# Altium PCB PendulOptic_pcb 1.PcbDoc (part 2 of 2)
Units mm, origin at the board's own origin, x right, y up, seen from the top; angles counter-clockwise.
Board outline 83.2 x 90 mm, 2 copper layers (Top Layer, Bottom Layer); 132 components, 90 nets, 419 pads, 153 vias.
Unrouted connection lines stored in the file: 4.
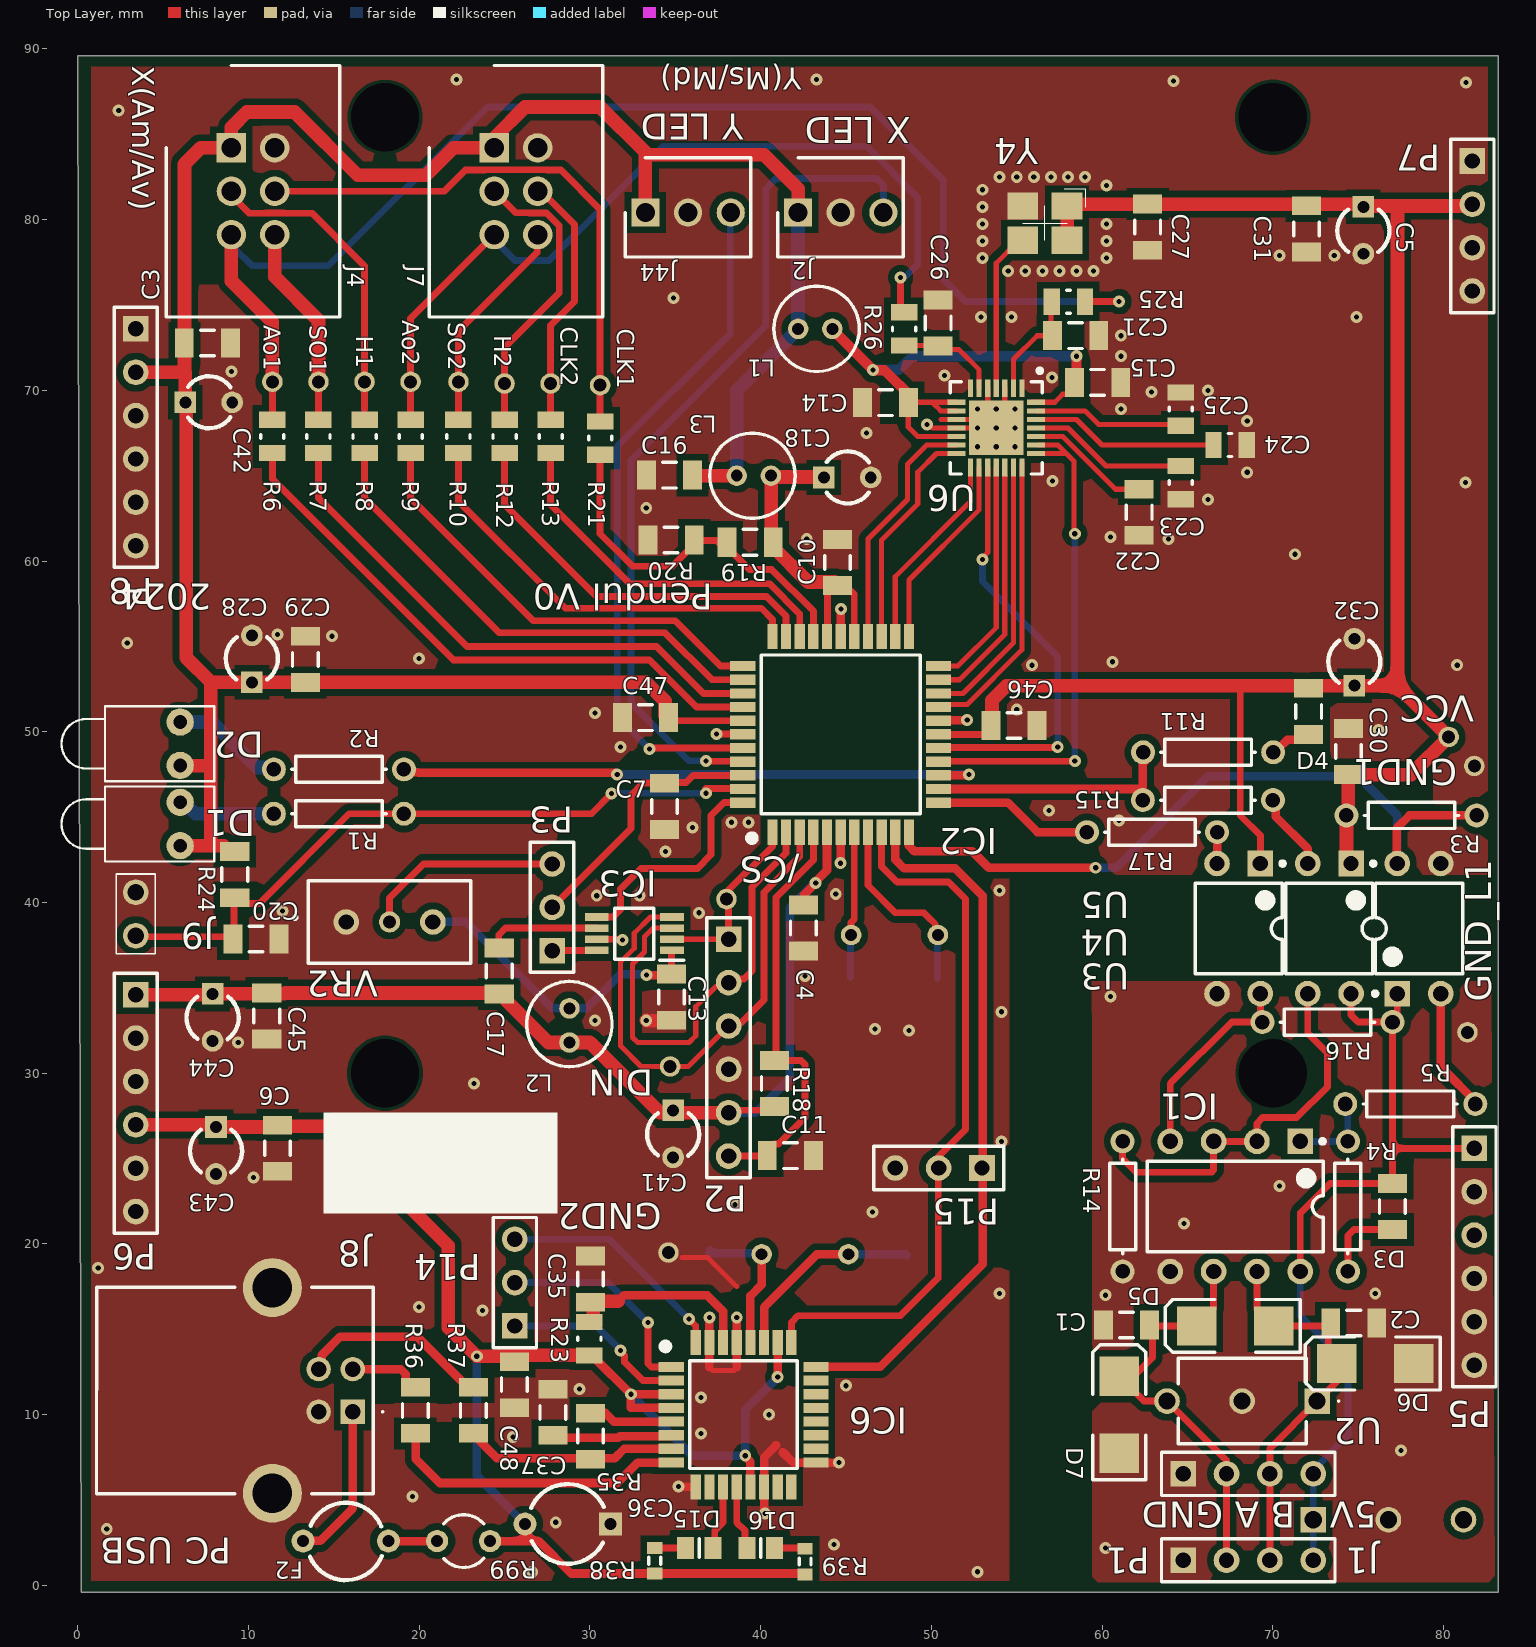
[diagram p0: Top Layer view]

## Other copper (continued)
Top Layer: (continued)
  pour cut-out: 14.508,63.869 14.677,63.7 16.392,63.7 16.392,63.531 23.815,56.108 23.315,55.608 22.769,55.608
  pour cut-out: 57.844,73.361 57.878,73.327 58.996,73.327 58.996,72.096 58.942,72.15 57.85,72.15
  pour cut-out: 57.625,76.043 58.425,76.043 58.425,74.325 58.975,74.325 58.996,74.304 58.996,73.455 57.939,73.455 57.75,73.266
  pour cut-out: 61.241,64.522 61.395,64.676 62.487,64.676 62.487,63.36 62.447,63.32 61.241,63.32
  pour cut-out: 71.513,47.8 73.813,47.8 73.813,46.8 71.513,46.8
Bottom Layer:
  pour cut-out: 81.225,27.415 81.225,26.825 81.15,26.75 82.873,26.75 82.873,27.337 82.795,27.415
  pour cut-out: 78.4,33.8 78.968,33.8 79.012,33.845 78.443,34.415 78.443,35.4
  pour cut-out: 70.092,33.848 70.264,33.676 76.143,33.676 76.143,33.957 76.015,34.085 70.275,34.085
  pour cut-out: 34.131,15.204 34.148,15.222 35.145,15.222 35.145,15.39 34.45,16.084
  pour cut-out: 33.204,14.669 33.204,14.527 32.655,13.978 30.807,15.827 30.807,15.938 30.634,15.765
  pour cut-out: 24.404,85.988 24.493,85.9 25.8,85.9 25.8,85.6 25.662,85.462 24.654,85.462
  pour cut-out: 40,83.6 40,82.9 40.2,82.7 40.512,83.012 45.606,83.012 45.606,83.262 45.855,83.512
  pour cut-out: 33.9,85.9 33.867,85.867 33.867,84.733 46.301,84.733 46.434,84.865 46.147,85.153 46.147,85.988

## Silkscreen, mask and mechanical layers (free items; w line width, h text height)
Top Overlay:
  rectangle: 14.4,21.8 28.1,27.7
  text "X(Am/Av)" at 3.2,89 h1.3 r270
  text "Y(Ms/Md)" at 42.4,88.9 h1.3 r180
  text "Y LED" at 39,86.2 h1.52 r180
  text "X LED" at 48.8,86 h1.52 r180
  text "Pendul V0                            2024" at 37.2,58.675 h1.52 r180
  text "5V   B A GND" at 76.1,4.9 h1.52 r180
  text "PC USB" at 9,2.8 h1.52 r180
Bottom Solder:
  rectangle: 38.1,20.525 47,21.55
  rectangle: 43.4,39.325 52.3,40.425
Mechanical 1:
  lines w0.254: 0.2,-0.3 0.2,89.6 83.275,89.6 83.275,-0.3 0.2,-0.3